# Altium PCB Controller-Test-Board.PcbDoc
Units mil, origin at the board's own origin, x right, y up, seen from the top; angles counter-clockwise.
Board outline 2090 x 1823 mil, 2 copper layers (Top Layer, Bottom Layer); 10 components, 4 nets, 168 pads, 18 vias.
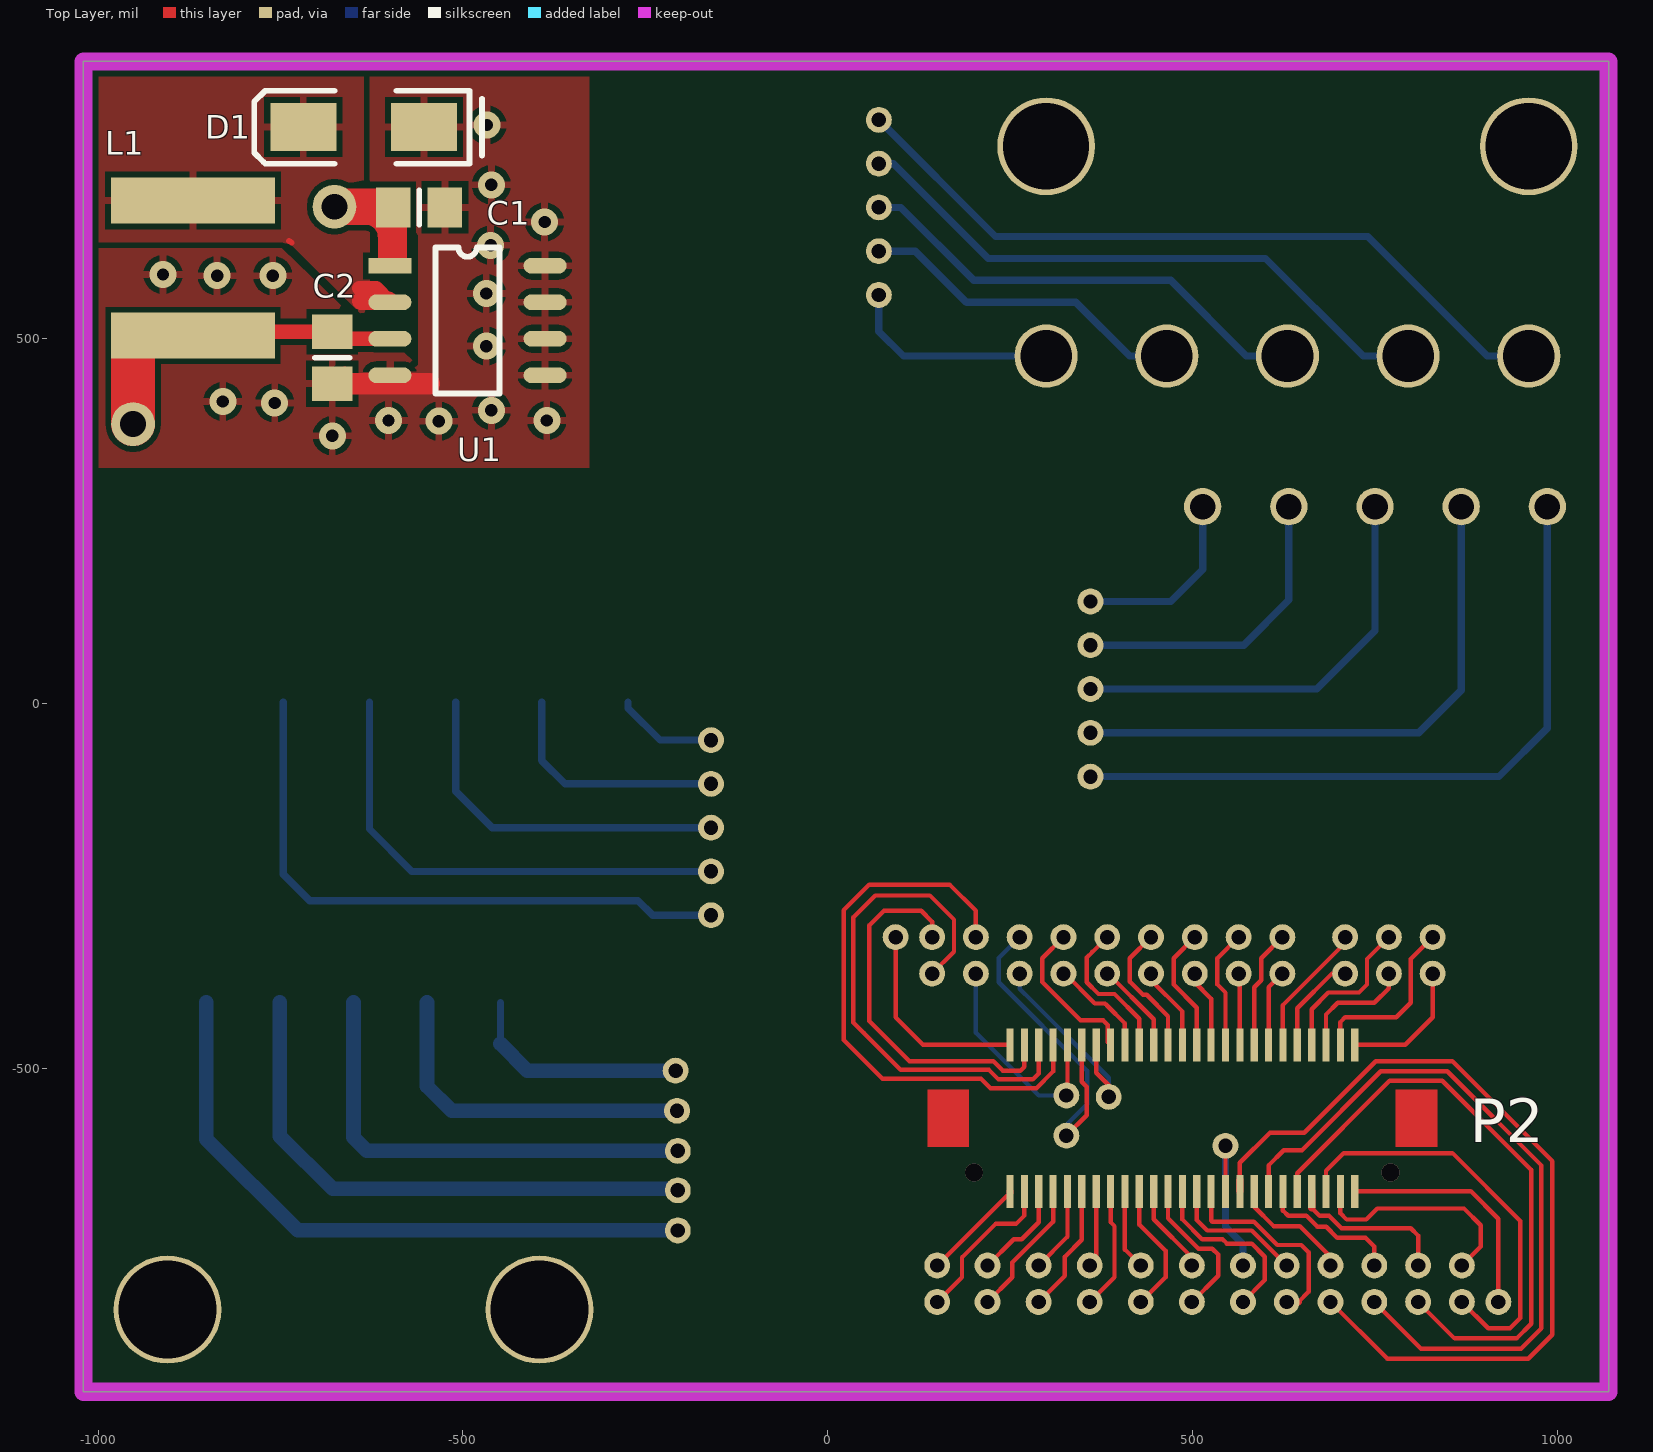
[diagram p0: Top Layer view]
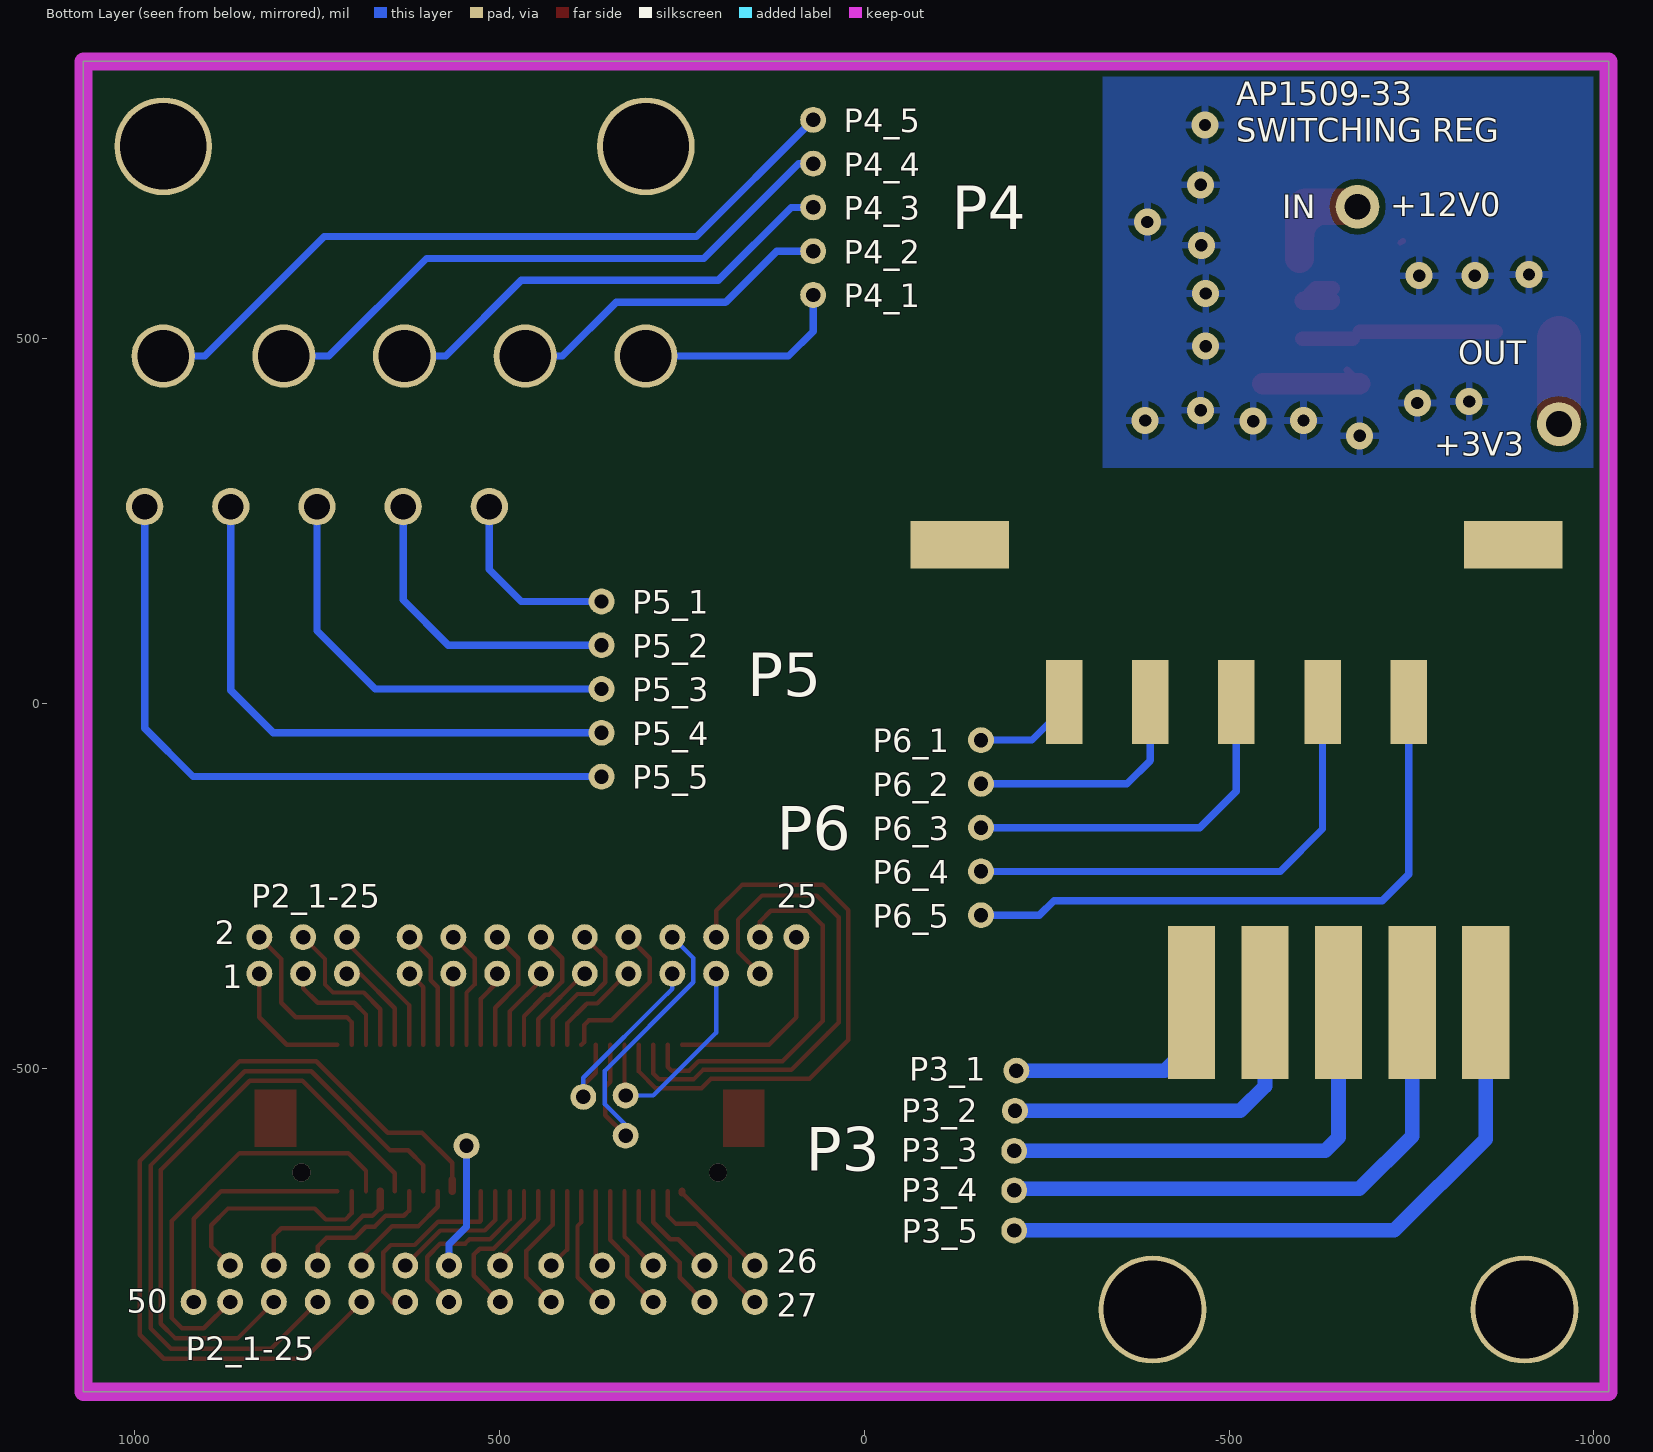
[diagram p1: Bottom Layer view, seen from below]

## Layer stack, top to bottom
Top Layer: signal copper 1.4
Dielectric: dielectric 12.6, FR-4, Dk 4.8
Bottom Layer: signal copper 1.4

## Board outline
-1020,880 1070,880 1070,-943 -1020,-943

## Design rules (kind name [scope] priority, off if disabled: settings)
Clearance [All] p1: gap=6
HoleToHoleClearance [All] p1: gap=6 allowstackedmicrovias=TRUE
PolygonConnect [All] p1: connectstyle=Relief reliefconductorwidth=10 reliefentries=4 polygonreliefangle="90 Angle"
RoutingVias [All] p1: holewidth=28 width=50 viastyle="Through Hole" minholewidth=12 minwidth=50 maxholewidth=200 maxwidth=200
ShortCircuit [All] p1: allowed=TRUE
SilkToSilkClearance [All] p1: silktosilkclearance=6
SilkscreenOverComponentPads [All] p1: minsilkscreentomaskgap=10
SolderMaskExpansion [All] p1: expansion=4
Width [All] p1: maxlimit=60 minlimit=6 preferedwidth=6
24 further rules are at their usual default settings.

## Components (designator, comment, footprint, x,y, rotation, side; value= is the part's Value field where it differs from the comment)
C1 "0.1uF" 6-0805_N -560,680 r180 top
C2 "0.47uF" 6-0805_N -679,474 r90 top
D1 "DIODE SCHOTTKY PWR 100V 2A SMA" SMA -636,790 r180 top
L1 "47µH" 1264EY-470M=P3 -870,597 r270 top
P2 "10106813-051112LF" 10106813-051112LF 486,-568 r180 top
P3 "0015912055" 0015912055 -650,-620.03 r0 bottom
P4 "0039303055" 0039303055 630,620 r0 bottom
P5 "5-103634-4" 5-103634-4 750,270 r0 bottom
P6 "2-1445057-5" 2-1445057-5 -510,110 r0 bottom
U1 "AP1509-33" 8SOIC -600,600 r0 top

## Footprints (in the part's own frame and the unit in brackets; to place one, negate y for a bottom-side part, rotate by r counter-clockwise, add the part's x,y. Pads: shape width x height; smd on the part's side, far side on the other; paste and mask are expansions set on the pad)
2-1445057-5 [mm] "5 Position TE Header"
  rect 1.27x2.92 smd: 1(6,2.74) 2(3,2.74) 3(0,2.74) 4(-3,2.74) 5(-6,2.74)
  rect 3.43x1.65 smd: ""(-9.635,-2.74) ""(9.635,-2.74)
5-103634-4 [mm] "5 Position TE AMP Header"
  round 1.3 hole 0.89: 1(-6,0) 2(-3,0) 3(0,0) 4(3,0) 5(6,0)
6-0805_N [mm] "Chip Resistor, Body 2.0x1.2mm, IPC Medium Density"
  rect 1.2x1.4 smd: 1(-0.9,0) 2(0.9,0)
  silkscreen extent 0,-0.6 0,0.6, body extent -1.07,-0.7 1.07,0.7, height 0.7
8SOIC [mm]
  rect 1.5x0.55 smd: 1(0,0)
  oval 1.5x0.55 smd: 2(0,-1.27) 3(0,-2.54) 4(0,-3.81) 5(5.4,-3.81) 6(5.4,-2.54) 7(5.4,-1.27) 8(5.4,0)
  silkscreen extent 1.58,-4.44 3.82,0.64, body extent -0.4,-4.4 5.8,0.6, height 1.73
1264EY-470M=P3 [mm] "47uH Shielded Inductor 1.7A"
  rect 1.6x5.7 smd: 1(-2.35,0) 2(2.35,0)
10106813-051112LF [mm] "Mezzostak Mezzanine Header"
  rect 0.25x1.15 smd: 1(-6,-2.55) 2(-5.5,-2.55) 3(-5,-2.55) 4(-4.5,-2.55) 5(-4,-2.55) 6(-3.5,-2.55) 7(-3,-2.55) 8(-2.5,-2.55) 9(-2,-2.55) 10(-1.5,-2.55) 11(-1,-2.55) 12(-0.5,-2.55) 13(0,-2.55) 14(0.5,-2.55) 15(1,-2.55) 16(1.5,-2.55) 17(2,-2.55) 18(2.5,-2.55) 19(3,-2.55) 20(3.5,-2.55) 21(4,-2.55) 22(4.5,-2.55) 23(5,-2.55) 24(5.5,-2.55) 25(6,-2.55) 26(6,2.55) 27(5.5,2.55) 28(5,2.55) 29(4.5,2.55) 30(4,2.55) 31(3.5,2.55) 32(3,2.55) 33(2.5,2.55) 34(2,2.55) 35(1.5,2.55) 36(1,2.55) 37(0.5,2.55) 38(0,2.55) 39(-0.5,2.55) 40(-1,2.55) 41(-1.5,2.55) 42(-2,2.55) 43(-2.5,2.55) 44(-3,2.55) 45(-3.5,2.55) 46(-4,2.55) 47(-4.5,2.55) 48(-5,2.55) 49(-5.5,2.55) 50(-6,2.55)
  Top Layer region: 7.425,-1 8.875,-1 8.875,1 7.425,1
  Top Layer region: -8.875,-1 -7.425,-1 -7.425,1 -8.875,1
0015912055 [mm] "5 Position SL Header"
  rect 1.65x5.33 smd: 1(5.12,-5.345) 2(2.56,-5.345) 3(0,-5.345) 4(-2.56,-5.345) 5(-5.12,-5.345)
  round 3.76 hole 3.4: ""(-6.475,5.345) ""(6.475,5.345)
0039303055 [mm] "5 Position Header"
  round 2.2 hole 1.8: 1(-8.4,3.65) 2(-4.2,3.65) 3(0,3.65) 4(4.2,3.65) 5(8.4,3.65)
  round 3.4 hole 3: ""(-8.4,-3.65) ""(8.4,-3.65)
SMA [mm] "DO-214-AC/SMA; 2 C-Bend Leads; Body 5.3 x 2.7 mm, inc. leads (LxW)"
  rect 2.3x1.67 smd: A(-2.1,0) K(2.1,0)
  silkscreen extent -4.11,-1.27 3.81,1.27

## Part data
C1: library part "CAP CER 0.1UF 50V 10% X7R 0805"
C2: library part "CAP CER 0.47UF 50V 10% X7R 0805"
L1: library part "IND 3.3UH FERRITE 1.04A"

## Free pads (board coordinates)
  round 60 hole 35.43: 15(-952,383) 15(-676,681)
  round 35.43 hole 19.68: 16(-208.52,-503) 16(-206.52,-558) 16(-205.52,-722) 16(-205.52,-667) 16(-205.52,-613) 16(-160,-290) 16(-160,-230) 16(-160,-170) 16(-160,-110) 16(-160,-50) 16(70,560) 16(70,620) 16(70,680) 16(70,740) 16(70,800) 16(93,-320) 16(143,-370) 16(143,-320) 16(150,-820) 16(150,-770) 16(203,-370) 16(203,-320) 16(219,-820) 16(219,-770) 16(263,-370) 16(263,-320) 16(289,-820) 16(289,-770) 16(323,-370) 16(323,-320) 16(327,-592) 16(327,-537) 16(359,-820) 16(359,-770) 16(360,-100) 16(360,-40) 16(360,20) 16(360,80) 16(360,140) 16(383,-370) 16(383,-320) 16(385,-539) 16(429,-820) 16(429,-770) 16(443,-370) 16(443,-320) 16(499,-820) 16(499,-770) 16(503,-370) 16(503,-320) 16(545,-606) 16(563,-370) 16(563,-320) 16(569,-820) 16(569,-770) 16(623,-370) 16(623,-320) 16(629,-820) 16(629,-770) 16(689,-820) 16(689,-770) 16(709,-370) 16(709,-320) 16(749,-820) 16(749,-770) 16(769,-370) 16(769,-320) 16(809,-820) 16(809,-770) 16(829,-370) 16(829,-320) 16(869,-820) 16(869,-770) 16(919,-820)

## Via types
v1: diameter 37, hole 17, Top Layer to Bottom Layer, 16 vias
v2: diameter 24.61, hole 24.61, Top Layer to Bottom Layer, 2 vias

## Nets (pads, with @x,y where several pads share a name; then routed paths per layer and width w, separated by ;. In a path a pad name is that pad's centre, name@x,y a point inside that pad or via, vN(x,y) a via of type N, cw(c..) or ccw(c..) an arc to the next point about the centre after c; other vN are vias at no path point)
+3V3: C2.2 L1.2 pad.15@-952,383 U1.3 | length 373.6
  Top Layer w20: L1.2@-865.05,509.43 C2.2 ; C2.2@-669.57,500 U1.3
  Top Layer w60: pad.15@-952,383 L1.2@-952,501
+12V0: C1.2 pad.15@-676,681 U1.1 | length 164.9
  Top Layer w10: -632,661 cw(c-632.5,640.35) -611.86,640.79
  Top Layer w40: U1.1@-596.43,610 C1.2@-596.43,672.43
  Top Layer w50: pad.15@-676,681 C1.2@-605,681
GND: C1.1 C2.1 D1.A U1.4 U1.5 U1.6 U1.7 U1.8 | length 132.6
  Top Layer w29.53: C2.1 -546.43,438.57
  other v1: -679,367 -533,387 -602,388 -385,388 -461,402 -758,412 -829,414 -468,490 -468,562 -836.89,586.37 -760.59,586.37 -911,588 -462,628.09 -388,660 -461,711 -467,793
OUTPUT: D1.K L1.1 U1.2 | length 91.6
  Top Layer w8: -738.21,633.79 cw(c-744.72,618.21) -734.52,631.66
  Top Layer w20: -642,569 -619,569 -602,552 U1.2
  Top Layer w25: -639.48,552 U1.2@-602,552
pads on no net: P2.1 P2.2 P2.3 P2.4 P2.5 P2.6 P2.7 P2.8 P2.9 P2.10 P2.11 P2.12 P2.13 P2.14 P2.15 P2.16 P2.17 P2.18 P2.19 P2.20 P2.21 P2.22 P2.23 P2.24 P2.25 P2.26 P2.27 P2.28 P2.29 P2.30 P2.31 P2.32 P2.33 P2.34 P2.35 P2.36 P2.37 P2.38 P2.39 P2.40 P2.41 P2.42 P2.43 P2.44 P2.45 P2.46 P2.47 P2.48 P2.49 P2.50 P3. P3.1 P3.2 P3.3 P3.4 P3.5 P4. P4.1 P4.2 P4.3 P4.4 P4.5 P5.1 P5.2 P5.3 P5.4 P5.5 P6. P6.1 P6.2 P6.3 P6.4 P6.5
copper on no net: | length 25829.2
  Top Layer w6: 93,-320 93,-430 130.61,-467.61 249.78,-467.61 ; 143,-370 173,-340 173,-296 140,-263 65,-263 35,-293 35,-437 50,-452 100,-502 221,-502 234,-515 281,-515 289.15,-506.85 289.15,-504.85 289.15,-467.61 ; 143,-320 143,-299 128,-284 77,-284 57,-304 57,-424 57,-435 112,-490 161,-490 224,-490 227,-490 240,-503 264,-503 269.46,-497.54 269.46,-467.61 ; 150,-820 184,-786 184,-759 230,-713 258,-713 269.46,-701.54 269.46,-668.39 ; 150,-770 249.78,-670.22 ; 203,-320 203,-284 167,-248 57,-248 22,-283 22,-461 75,-514 210,-514 223,-527 286,-527 308.83,-504.17 308.83,-467.61 ; 219,-820 253,-786 253,-766 308.83,-710.17 308.83,-668.39 ; 219,-770 255,-734 266,-734 289.15,-710.85 289.15,-668.39 ; 289,-820 325,-784 325,-758 348.2,-734.8 348.2,-668.39 ; 289,-770 328.52,-730.48 328.52,-668.39 ; 323,-370 324.72,-370 ; 323,-320 294,-349 294,-363 294,-381.61 346.36,-433.97 377.37,-433.97 383.81,-440.41 383.81,-463.84 387.57,-467.61 ; 325,-370 366,-411 380,-411 381.15,-412.15 383,-414 407.26,-438.26 407.26,-467.61 ; 327,-592 355,-564 355,-525 348.2,-518.2 348.2,-467.61 ; 328.52,-535.48 328.52,-467.61 ; 359,-820 393,-786 393,-716 387.57,-710.57 387.57,-668.39 ; 367.89,-761.11 367.89,-668.39 ; 367.89,-467.61 367.89,-505.89 385,-523 385,-539 ; 383,-320 362.69,-340.31 355,-348 355,-382 371,-398 393,-398 426.94,-431.94 426.94,-438.94 426.94,-467.61 ; 384,-370 446.63,-432.63 446.63,-438.63 446.63,-467.61 ; 407.26,-668.39 407.26,-748.26 429,-770 ; 426.94,-668.39 426.94,-713.94 463,-750 463,-786 429,-820 ; 443,-379 486,-422 486,-467.61 ; 443,-320 414,-349 414,-363 414,-381 432,-399 437,-399 466.31,-428.31 466.31,-467.61 ; 446.63,-668.39 446.63,-706.63 499,-759 ; 466.31,-668.39 466.31,-700.31 466.31,-705.31 508,-747 527,-747 535,-755 535,-784 499,-820 ; 486,-668.39 486,-698 486,-707 513,-734 541,-734 547,-740 562,-740 581,-740 599,-758 599,-790 569,-820 ; 503,-382 525.37,-404.37 525.37,-406.37 525.37,-467.61 ; 503,-320 474,-349 474,-385 505.68,-416.68 505.68,-467.61 ; 505.68,-668.39 505.68,-696.68 505.68,-707.68 520,-722 581,-722 629,-770 ; 525.37,-668.39 525.37,-708.37 527,-710 584,-710 616,-742 621,-742 649,-742 659,-752 659,-806 645,-820 ; 545.05,-668.39 545.05,-606.05 ; 545.05,-467.61 545.05,-396.05 534,-385 534,-349 563,-320 ; 564.74,-668.39 564.74,-629.26 606,-588 629,-588 650,-588 653,-588 751,-490 856,-490 993,-627 993,-865 960,-898 767,-898 689,-820 ; 564.74,-467.61 564.74,-371.74 ; 584.43,-668.39 584.43,-689.43 611,-716 647,-716 689,-758 ; 584.43,-467.61 584.43,-391.57 584.43,-388.57 594,-379 594,-349 623,-320 ; 604.11,-668.39 604.11,-639.89 604.11,-632.89 625,-612 650,-612 758,-504 849,-504 978,-633 978,-856 950,-884 813,-884 749,-820 ; 604.11,-467.61 604.11,-388.89 623,-370 ; 623.8,-668.39 623.8,-694.8 631,-702 656,-702 671,-717 683,-717 698,-732 737,-732 749,-744 749,-770 ; 623.8,-467.61 623.8,-413.2 709,-328 ; 643.48,-668.39 643.48,-643.52 770,-517 842,-517 964,-639 964,-850 944,-870 859,-870 809,-820 ; 643.48,-467.61 643.48,-417.52 691,-370 709,-370 ; 663.17,-691.17 674,-702 687,-702 704,-719 799,-719 809,-729 809,-770 ; 663.17,-467.61 663.17,-425.83 663.17,-418.83 686,-396 728,-396 739,-385 739,-350 769,-320 ; 682.85,-668.39 682.85,-640.15 707,-616 845,-616 856,-616 949,-709 949,-837 949,-842 935,-856 905,-856 869,-820 ; 682.85,-467.61 682.85,-426.15 699,-410 749,-410 769,-390 769,-370 ; 702.54,-668.39 702.54,-698.54 711,-707 738,-707 753,-692 872,-692 895,-715 895,-744 869,-770 ; 702.54,-467.61 702.54,-436.46 709,-430 779,-430 799,-410 799,-350 829,-320 ; 722.22,-668.39 881.39,-668.39 919,-706 919,-820 ; 722.22,-467.61 791.39,-467.61 829,-430 829,-370
  Top Layer w10: -679,438.57 -679,440 -662,457 ; 249.78,-670.22 249.78,-668.39 ; 359,-770 367.89,-761.11 ; 383,-380 383,-370 383,-375 ; 443,-379 443,-370 ; 499,-770 499,-759 ; 503,-382 503,-370 ; 564.74,-668.39 564.74,-652.26 ; 629,-820 645,-820 ; 663.17,-691.17 663.17,-668.39 ; 689,-770 689,-758 ; 709,-328 709,-320
  Bottom Layer w6: 203,-370 203,-451 289,-537 327,-537 ; 263,-370 263,-391 270.72,-398.72 270.9,-398.72 385,-512.81 385,-539 ; 263,-320 234.28,-348.72 234.28,-381.89 355.72,-503.33 355.72,-548.89 327,-577.61 327,-592
  Bottom Layer w10: -746.22,2.13 -746.22,-233.78 -710,-270 -260,-270 -240,-290 -160,-290 ; -678.52,-665 -676.52,-667 ; -628.11,2.13 -628.11,-171.89 -570,-230 -160,-230 ; -510,2.13 -510,-120 -460,-170 -160,-170 ; -448.43,-466.09 -448.43,-409.6 ; -391.89,2.13 -391.89,-78.11 -360,-110 -160,-110 ; -273.78,2.13 -273.78,-6.22 -230,-50 -160,-50 ; 70,560 70,510 103.7,476.3 299.29,476.3 ; 70,620 120,620 190,550 340,550 413.7,476.3 464.65,476.3 ; 70,680 100,680 200,580 470,580 573.7,476.3 630,476.3 ; 70,740 90,740 220,610 600,610 733.7,476.3 795.35,476.3 ; 70,800 230,640 740,640 903.7,476.3 960.71,476.3 ; 360,-100 920,-100 986.22,-33.78 986.22,270 ; 360,-40 810,-40 868.11,18.11 868.11,270 ; 360,20 670,20 750,100 750,270 ; 360,80 570,80 631.89,141.89 631.89,270 ; 360,140 470,140 513.78,183.78 513.78,270 ; 545,-606 545,-717 569,-741 569,-770
  Bottom Layer w20: -851.57,-409.6 -851.57,-596.95 -726.52,-722 -205.52,-722 ; -750.79,-409.6 -750.79,-592.73 -678.52,-665 -205.52,-665 ; -650,-409.6 -650,-585.52 -650,-594.52 -631.52,-613 -205.52,-613 ; -549.21,-409.6 -549.21,-524.31 -515.52,-558 -206.52,-558 ; -448.43,-466.09 -411.52,-503 -208.52,-503
  other v2: 200.57,-642.8 771.43,-642.8

## Polygon pours and split planes (outlines as drawn)
GND on Top Layer "Top Layer-GND" (solid, pour order 1001): -649.06,543.06 -666,544 -748,624 -1009,624 -1009,323 -327,323 -327,871 -628,871 -628,717 -561,642 -561,463 -605.03,503.03
OUTPUT on Top Layer "Top Layer-OUTPUT" (solid, pour order 1002): -628,871 -1009,871 -1009,631 -737,631 -639,533 -544,533 -544,569 -628,569
GND on Bottom Layer "Bottom Layer-GND" (solid, pour order 1000): -327,871 -327,323 -1009,323 -1009,871

## Keep-outs
Keep-Out Layer:
  the board outline again, w25

## Silkscreen, mask and mechanical layers (free items; w line width, h text height)
Bottom Overlay:
  text "AP1509-33" at -510,820 h32
  text "P4_5" at 28.24,783 h32
  text "SWITCHING REG" at -510,770 h32
  text "P4_4" at 28.24,723 h32
  text "+12V0" at -721,668 h32
  text "IN" at -573,665 h32
  text "P4_3" at 28.24,663 h32
  text "P4_2" at 28.24,603 h32
  text "P4_1" at 28.24,543 h32
  text "OUT" at -814,465 h32
  text "+3V3" at -781,340 h32
  text "P5_1" at 318.24,123 h32
  text "P5_2" at 318.24,63 h32
  text "P5_3" at 318.24,3 h32
  text "P5_4" at 318.24,-57 h32
  text "P6_1" at -11.76,-67 h32
  text "P5_5" at 318.24,-117 h32
  text "P6_2" at -11.76,-127 h32
  text "P6_3" at -11.76,-187 h32
  text "P6_4" at -11.76,-247 h32
  text "25" at 120,-280 h32
  text "P2_1-25" at 840,-280 h32
  text "P6_5" at -11.76,-307 h32
  text "2" at 890,-330 h32
  text "1" at 880,-390 h32
  text "P3_1" at -61.76,-517 h32
  text "P3_2" at -50.52,-574 h32
  text "P3_3" at -50.52,-628 h32
  text "P3_4" at -50.52,-683 h32
  text "P3_5" at -51.52,-739 h32
  text "26" at 120,-780 h32
  text "50" at 1011,-835 h32
  text "27" at 120,-840 h32
  text "P2_1-25" at 930,-900 h32